# Altium PCB merigold_v1.PcbDoc
Units mm, origin at the board's own origin, x right, y up, seen from the top; angles counter-clockwise.
Board outline 99.57 x 99.57 mm, 2 copper layers (Top Layer, Bottom Layer), stack 0.325 mm thick; 34 components, 22 nets, 139 pads, 5 vias.
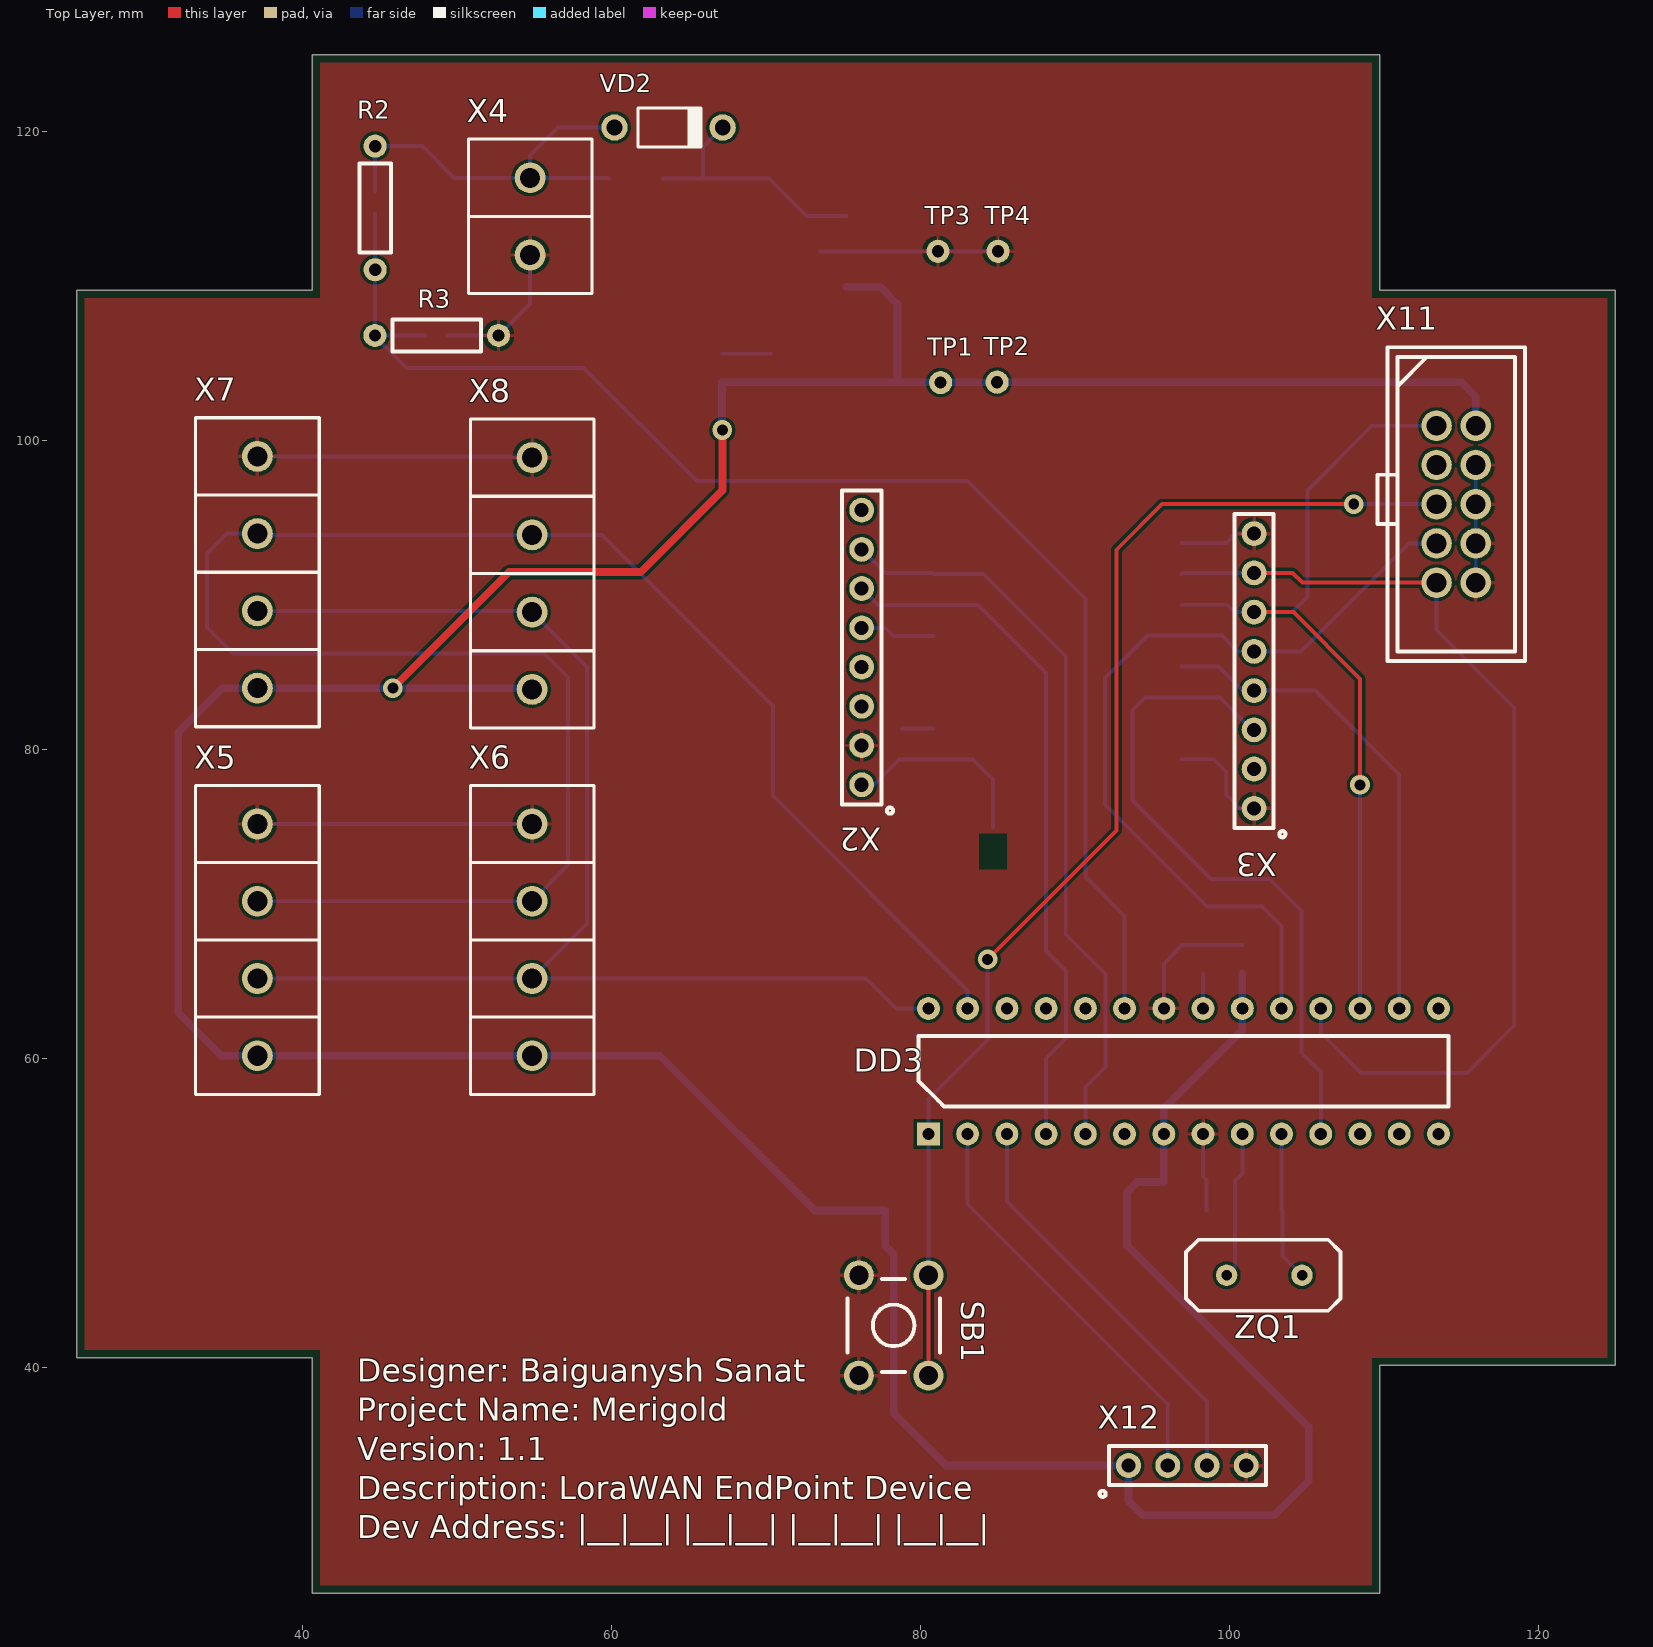
[diagram p0: Top Layer view]
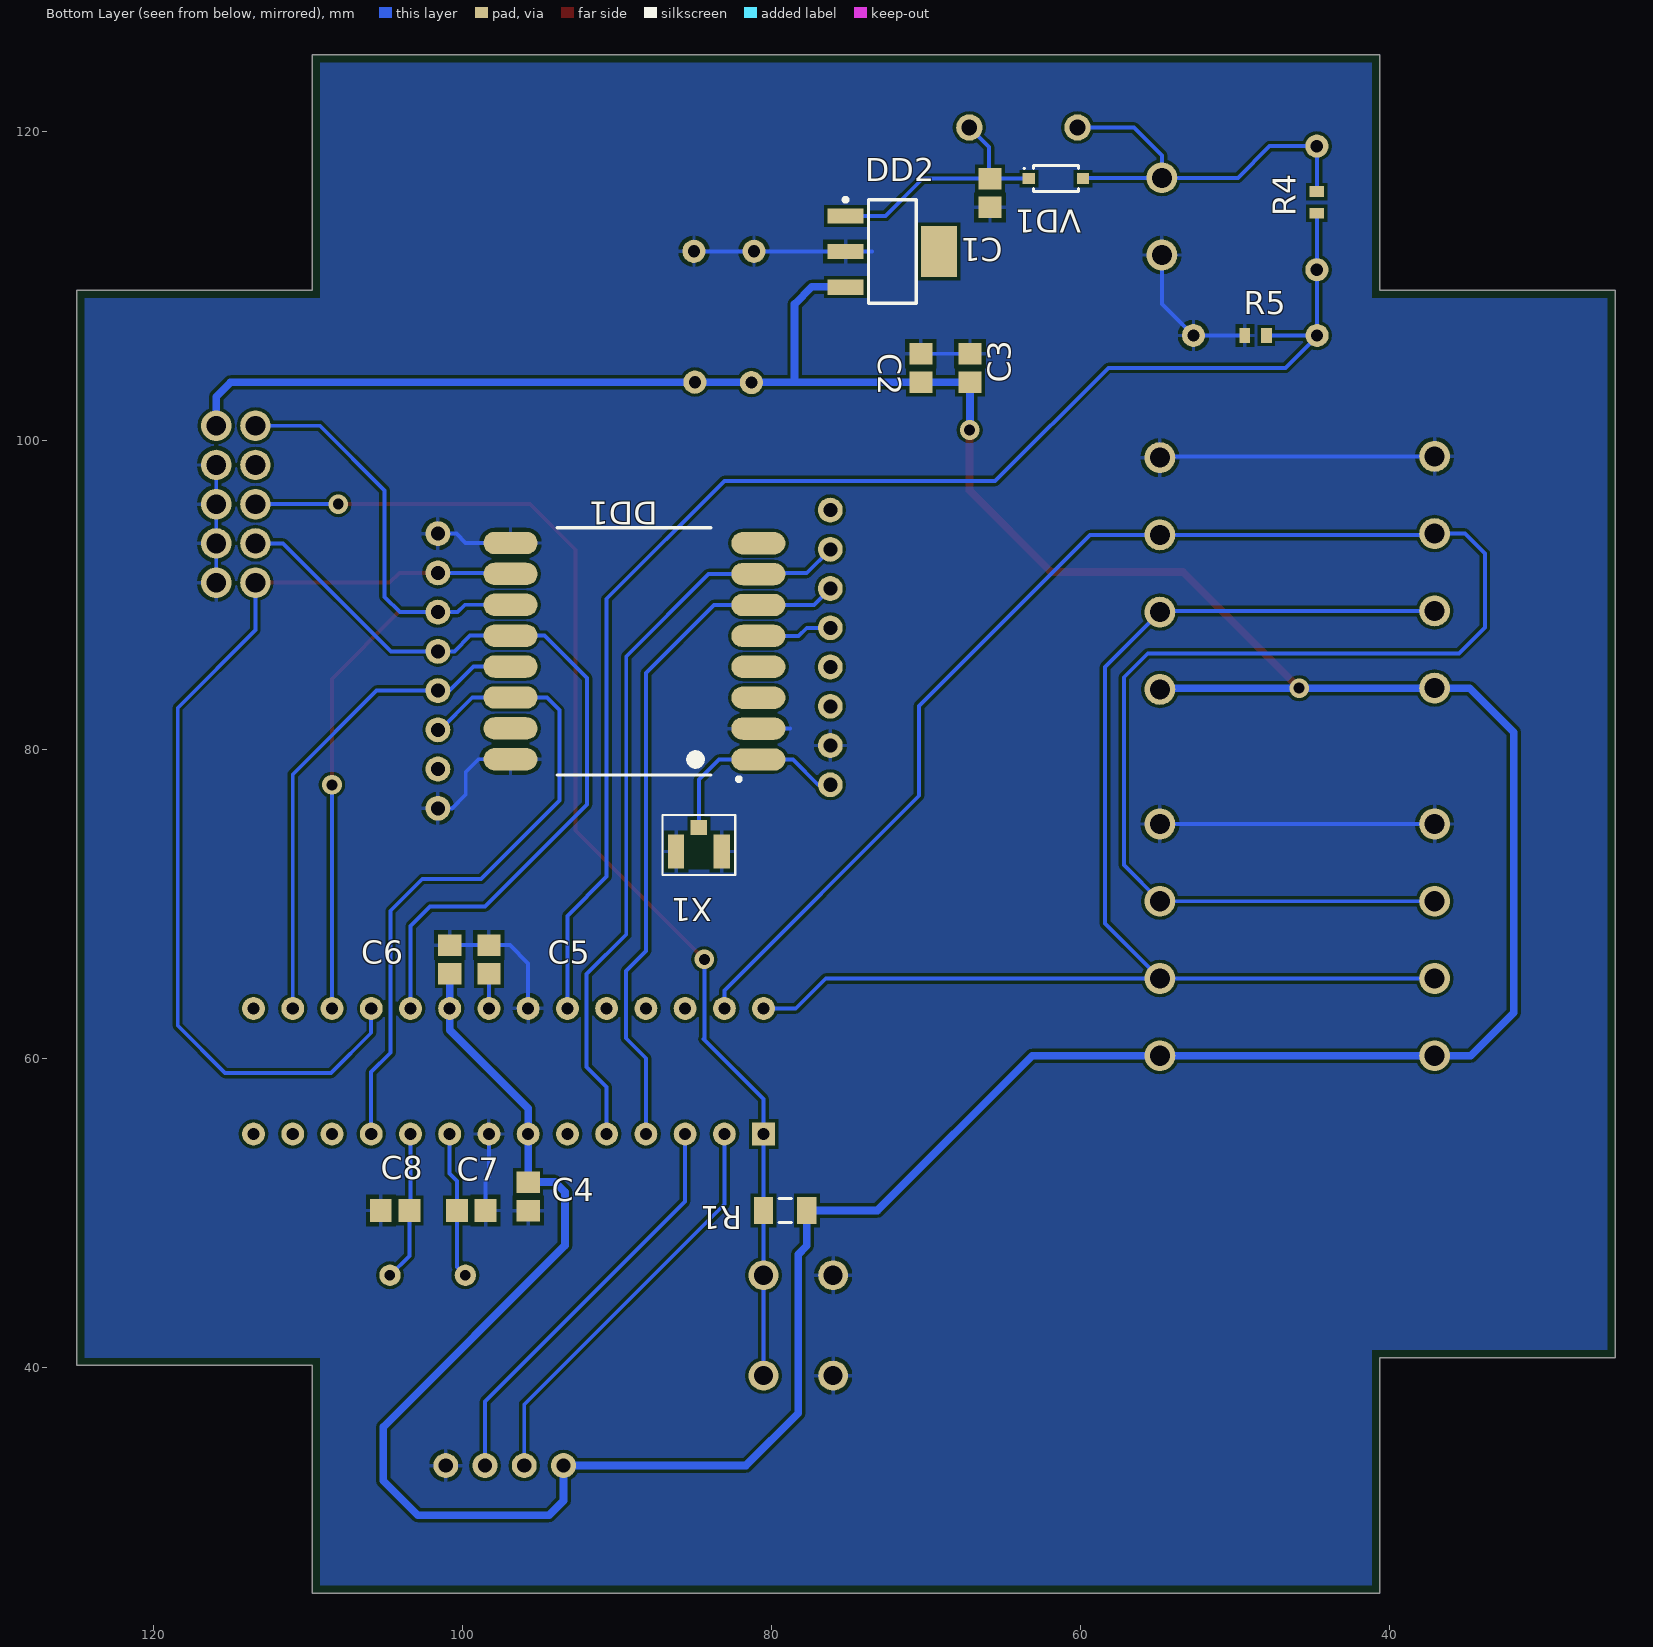
[diagram p1: Bottom Layer view, seen from below]

## Layer stack, top to bottom
Top Solder: solder mask 0.0102, Solder Resist, Dk 3.5
Top Layer: signal copper 0.0356
Dielectric 1: core 0.254, FR-4, Dk 4.2
Bottom Layer: signal copper 0.0356
Bottom Solder: solder mask 0.0102, Solder Resist, Dk 3.5

## Board outline
25.4,40.64 25.4,109.728 40.64,109.728 40.64,124.968 109.728,124.968 109.728,109.728 124.968,109.728 124.968,40.132 109.728,40.132 109.728,25.4 40.64,25.4 40.64,40.64

## Design rules (kind name [scope] priority, off if disabled: settings)
Clearance [All] p1: gap=0.2 ignorepadtopadclearanceinfootprint=FALSE except(0.254: Arc-Arc Arc-Track Track-Track)
PolygonConnect [All] p1: connectstyle=Relief reliefconductorwidth=0.254 reliefentries=4 polygonreliefangle="90 Angle" airgapwidth=0.254
RoomDefinition merigold [InComponentClass('merigold')] p1: confinementstyle=ConfineIn formatcopy=TRUE lockcomponents=FALSE outline 0,0 154.051,0 154.051,142.113 0,142.113
RoutingVias [All] p1: holewidth=0.711 width=1.27 viastyle="Through Hole" minholewidth=0.711 minwidth=1.27 maxholewidth=0.711 maxwidth=1.27
SolderMaskExpansion [All] p1: expansion=0.102
Width Width_+3V3 [InNet('+3V3')] p1: maxlimit=2 minlimit=0.254 preferedwidth=0.254
Width [All] p2: maxlimit=0.254 minlimit=0.254 preferedwidth=0.254
30 further rules are at their usual default settings.

## Components (designator, comment, footprint, x,y, rotation, side; value= is the part's Value field where it differs from the comment)
C1 "10U10V_CAPC" CAPC2012X14M/0805 65.862,116.027 r90 bottom
C2 "10U10V_CAPC" CAPC2012X14M/0805 70.333,104.699 r270 bottom
C3 "1U16V_CAPC" CAPC2012X14M/0805 67.158,104.699 r270 bottom
C4 "1U16V_CAPC" CAPC2012X14M/0805 95.758,51.079 r90 bottom
C5 "1U16V_CAPC" CAPC2012X14M/0805 98.298,66.421 r90 bottom
C6 "1U16V_CAPC" CAPC2012X14M/0805 100.838,66.421 r90 bottom
C7 "22P250V_CAPC" CAPC2012X14M/0805 99.441,50.165 r0 bottom
C8 "22P250V_CAPC" CAPC2012X14M/0805 104.369,50.165 r180 bottom
DD1 "HPD13A (RFM95)" SOJ200P1600X200-16M 88.9,86.36 r0 bottom
DD2 "LM1117MPX-3.3/NOPB" SOT230P700X180-4M 72.187,112.243 r180 bottom
DD3 "ATMEGA328" PDIP28 97.028,59.182 r90 top
R1 "10K1206" RESC3216X07N/1206 79.121,50.165 r180 bottom
R2 "RNF14FTD100K" RESAD800W55L600D230 44.704,115.062 r90 top
R3 "RNF14FTD100K" RESAD800W55L600D230 48.692,106.807 r180 top
R4 "100K0603" RESC1608X06N/0603 44.704,115.418 r90 bottom
R5 "100K0603" RESC1608X06N/0603 48.666,106.807 r180 bottom
SB1 "BTN_TACTILE_6X6" BTN_TACTILE_6X6 76.018,39.474 r90 top
TP1 "TP_TH" TH_TP 81.305,103.759 r0 top
TP2 "TP_TH" TH_TP 84.963,103.784 r0 top
TP3 "TP_TH" TH_TP 81.139,112.254 r0 top
TP4 "TP_TH" TH_TP 85.025,112.254 r0 top
VD1 "MBR120VLSFT1G" SOD-123 61.595,116.967 r180 bottom
VD2 "HER107G R0G" DO-204AL 60.198,120.269 r0 top
X1 "U.FL-R-SMT-1_sch" U.FL-R-SMT-1 84.709,73.406 r0 bottom
X2 "PLS_8" PLS_8 76.2,77.724 r180 top
X3 "PLS_8" PLS_8 101.6,76.2 r180 top
X4 "2EDGV-5.0-02P" 2EDGV-5.0-02P 54.737,117.014 r270 top
X5 "2EDGV-5.0-04P" 2EDGV-5.0-04P 37.084,60.184 r90 top
X6 "2EDGV-5.0-04P" 2EDGV-5.0-04P 54.864,60.184 r90 top
X7 "2EDGV-5.0-04P" 2EDGV-5.0-04P 37.084,83.98 r90 top
X8 "2EDGV-5.0-04P" 2EDGV-5.0-04P 54.864,83.9 r90 top
X11 "ISP" 302_SERIES_10POS 113.411,100.965 r0 top
X12 "61300411121" PLS_4 93.472,33.655 r90 top
ZQ1 "HC49U-8-30-50-70-30-ATF" XTAL1050X465X350 104.702,45.974 r180 top

## Footprints (in the part's own frame and the unit in brackets; to place one, negate y for a bottom-side part, rotate by r counter-clockwise, add the part's x,y. Pads: shape width x height; smd on the part's side, far side on the other; paste and mask are expansions set on the pad)
2EDGV-5.0-02P [mm]
  round 2 hole 1.3: 1(0,0) 2(5,0)
  silkscreen extent -2.5,-4 7.5,4, body extent -2.5,-4 7.5,4, height 12
2EDGV-5.0-04P [mm]
  round 2 hole 1.3: 1(0,0) 2(5,0) 3(10,0) 4(15,0)
  silkscreen extent -2.5,-4 17.5,4, body extent -2.5,-4 17.5,4, height 12
302_SERIES_10POS [mm] "2.54MM DUAL ROW VERTICAL BOX HEADER"
  round 1.97 hole 1.27: 1(0,0) 2(2.54,0) 3(0,-2.54) 4(2.54,-2.54) 5(0,-5.08) 6(2.54,-5.08) 7(0,-7.62) 8(2.54,-7.62) 9(0,-10.16) 10(2.54,-10.16)
  silkscreen extent -3.81,-15.24 5.71,5.08
BTN_TACTILE_6X6 [mm] "SWITCH TACTILE SPST-NO 0.05A 24V"
  round 1.94 hole 1.24: 1(0,0) 2(6.5,0) 3(0,-4.5) 4(6.5,-4.5)
  silkscreen extent 0.25,-5.25 6.25,0.75, body extent 0.25,-5.25 6.25,0.75, height 8
CAPC2012X14M/0805 [mm] "Chip Capacitor, 2-Leads, Body 2,00x1,25mm, IPC Low Density"
  rect 1.4x1.5 smd: 1(-0.925,0) 2(0.925,0)
  body extent -1,-0.63 1,0.63, height 1.35
DO-204AL [mm]
  round 1.71 hole 1.01: A(0,0) K(7,0)
  silkscreen extent 1.52,-1.27 5.59,1.27
PDIP28 [mil] "Plastic Dual  Inline Package 28-lead"
  rect 58.39x58.39 hole 30.83: 1(-160,650)
  round 58.39 hole 30.83: 2(-160,550) 3(-160,450) 4(-160,350) 5(-160,250) 6(-160,150) 7(-160,50) 8(-160,-50) 9(-160,-150) 10(-160,-250) 11(-160,-350) 12(-160,-450) 13(-160,-550) 14(-160,-650) 15(160,-650) 16(160,-550) 17(160,-450) 18(160,-350) 19(160,-250) 20(160,-150) 21(160,-50) 22(160,50) 23(160,150) 24(160,250) 25(160,350) 26(160,450) 27(160,550) 28(160,650)
  silkscreen extent -90,-675 90,675, body extent -150,-675 150,675, height 180
PLS_4 [mm]
  round 1.61 hole 0.91: 1(0,0) 2(0,-2.54) 3(0,-5.08) 4(0,-7.62)
  silkscreen extent -2.03,-8.89 1.27,1.88
PLS_8 [mm]
  round 1.61 hole 0.91: 1(0,0) 2(0,-2.54) 3(0,-5.08) 4(0,-7.62) 5(0,-10.16) 6(0,-12.7) 7(0,-15.24) 8(0,-17.78)
  silkscreen extent -2.03,-19.05 1.27,1.88
RESAD800W55L600D230 [mm]
  round 1.5 hole 0.8: 1(-4,0) 2(4,0)
  silkscreen extent -2.88,-1.02 2.88,1.02, body extent -3,-1.15 3,1.15, height 3.29
RESC1608X06N/0603 [mm] "Chip Resistor, 2-Leads, Body 1,60x0,82mm, IPC Medium Density"
  rect 0.7x0.95 smd: 1(-0.7,0) 2(0.7,0)
  body extent -0.85,-0.48 0.85,0.48, height 0.6
RESC3216X07N/1206 [mm] "Chip Resistor, 2-Leads, Body 3,20x1,60mm, IPC Medium Density"
  rect 1.25x1.75 smd: 1(-1.4,0) 2(1.4,0)
  silkscreen extent -0.4,-0.77 0.4,0.77, body extent -1.68,-0.87 1.68,0.87, height 0.71
SOD-123 [mm] "SODFL, 2-Leads, Body 1,55x3,70mm, IPC Medium Density"
  rect 0.8x0.7 smd: A(1.75,0) K(-1.75,0)
  silkscreen extent -2.1,-0.85 1.45,0.85, body extent -1.42,-0.85 1.43,0.85, height 1.35
SOJ200P1600X200-16M [mm] "SOJ, 16-Leads, Body 16,00x16,00mm, Pitch 2,00mm, IPC Low Density"
  oval 3.5x1.45 smd: 1(-8.045,7) 2(-8.045,5) 3(-8.045,3) 4(-8.045,1) 5(-8.045,-1) 6(-8.045,-3) 7(-8.045,-5) 8(-8.045,-7) 9(8.001,-7.015) 10(8.001,-5.015) 11(8.001,-3.015) 12(8.001,-1.015) 13(8.001,0.985) 14(8.001,2.985) 15(8.001,4.985) 16(8.001,6.985)
  silkscreen extent -6.9,-8 4.97,8.4, body extent -8,-8 8,8, height 2
SOT230P700X180-4M [mm] "SOT223, 4-Leads, Body 6,50x7,00mm (avg), Pitch 2,30mm, IPC Low Density"
  rect 2.35x1 smd: 1(-3.025,2.3) 2(-3.025,0) 3(-3.025,-2.3)
  rect 2.35x3.3 smd: 4(3.025,0)
  silkscreen extent -3.15,-3.35 1.55,3.47, body extent -1.85,-3.35 1.85,3.35, height 1.8
TH_TP [mm]
  round 1.5 hole 0.8: 1(0,0)
U.FL-R-SMT-1 [mm]
  rect 1.05x1 smd mask+0.051: 1(0,-1.55)
  rect 1.05x2.2 smd mask+0.051: 2(1.475,0) 3(-1.475,0)
  Top Layer pour cut-out: -0.914,1.143 0.889,1.143 0.889,-1.118 0.914,-1.143 -0.914,-1.143
  Bottom Layer pour cut-out: -0.914,1.143 0.889,1.143 0.889,-1.118 0.914,-1.143 -0.914,-1.143
  silkscreen extent -2.35,-2.36 2.35,1.53, body extent -1.5,-1.55 1.5,1.55, height 1.25
XTAL1050X465X350 [mm]
  round 1.38 hole 0.68: 1(0,0) 2(4.88,0)
  silkscreen extent -2.5,-2.3 7.5,2.3, body extent -2.5,-2.3 7.5,2.3, height 3.5

## Part data
C1 C2: "CAP CER 10UF 10V X5R 0805", Capacitance="10 µF", Manufacturer="Samsung Electro-Mechanics", Manufacturer Part Number=CL21A106KPFNNNG
C3 C4 C5 C6: "CAP CER 1UF 16V X7R 0805", Capacitance="1 µF", Manufacturer="Murata Manufacturing", Manufacturer Part Number=GRM21BR71C105KA01K
C7 C8: "CAP CER 22PF 250V C0G/NP0 0805", Capacitance="22 pF", Manufacturer="Murata Manufacturing", Manufacturer Part Number=GRM21A5C2E220JW01
DD1: "RF TXRX MODULE ISM<1GHZ", Manufacturer="RF Solutions", Manufacturer Part Number=RFM95W-868S2, Category="RF/IF and RFID"
DD2: library part AMS1117, "IC REG LIN 3.3V 800MA SOT223-4", Manufacturer="Texas Instruments", Manufacturer Part Number=LM1117MPX-3.3/NOPB
DD3: library part ATMEGA328P-PU, "IC MCU 8BIT 32KB FLASH 28DIP", Manufacturer="Microchip / Atmel", Manufacturer Part Number=ATMEGA328P-PU
R1: "RES SMD 10K OHM 1% 1/4W 1206", Manufacturer=Panasonic, Manufacturer Part Number=ERJ8ENF1002V, Rated Power="0.25 W", Resistance="10 kO", Tolerance (%)="±1 %"
R2 R3: library part 100K_AD800W55L600D230, "RES 100K OHM 1/4W 5% AXIAL", Manufacturer="Stackpole Electronics", Power (Watts)="0.25W, 1/4W", Resistance (Ohms)=100k, Category=Resistors, Manufacturer Part Number=RNF14FTD100K
R4 R5: "RES SMD 100K OHM 1% 1/4W 0603", Manufacturer=ESR03EZPF1003, Manufacturer Part Number=ESR03EZPF1003
SB1: "SWITCH TACTILE SPST-NO 0.05A 24V", Manufacturer="TE Connectivity Alcoswitch", Manufacturer Part Number=1825910-6, Pole Throw Configuration=SPST
TP1 TP2 TP3 TP4: "TEST POINT THROUGH HOLE"
VD1: "DIODE SCHOTTKY 20V 1A SOD123FL", Manufacturer="ON Semiconductor", Manufacturer Part Number=MBR120VLSFT1G
VD2: "DIODE GEN PURP 800V 1A DO204AL", Manufacturer="Taiwan Semiconductor Corporation", Manufacturer Part Number="HER107G R0G"
X1: "CONN U.FL RCPT STR 50 OHM SMD", Manufacturer=Hirose, Manufacturer Part Number=U.FL-R-SMT-1(10), Category="Connectors, Interconnects"
X2 X3: "CONN HEADER VERT 8POS 2.54MM", Manufacturer=Harwin, Manufacturer Part Number=M20-7820842, Category="Connector Headers and PCB Receptacles", Number of Contacts=8, Number of Rows=1, Pitch="2.54 mm"
X4: "TERM BLOCK HDR 2POS VERT 5MM", Manufacturer="Phoenix Contact", Manufacturer Part Number=1753437
X5 X6 X7 X8: "TERM BLOCK HDR 4POS VERT 5MM", Manufacturer="Phoenix Contact", Manufacturer Part Number=1753479
X11: "CONN HEADER VERT 10POS 2.54MM", Manufacturer="On-Shore Technology", Manufacturer Part Number=302-S101, Category="Connectors, Interconnects", ManufacturerPartNumber=302-S101, Number of Positions=10, Number of Rows=2, Pitch="0.100\" (2.54mm)"
X12: library part PLS_4, "CONN HEADER VERT 4POS 2.54MM", Manufacturer="Wurth Electronics", Category="Connectors, Interconnects", Manufacturer Part Number=61300411121, Number of Contacts=3, Number of Positions=3, Number of Rows=1, Pitch="0.100\" (2.54mm)"
ZQ1: "CRYSTAL 8.0MHZ 30PF SMD", Frequency="8 MHz", Load Capacitance="30 pF", Manufacturer="IQD Frequency Products", Category=Crystals, Manufacturer Part Number=HC49U-8-30-50-70-30-ATF

## Via types
v1: diameter 1.27, hole 0.711, Top Layer to Bottom Layer, 5 vias

## Nets (pads, with @x,y where several pads share a name; then routed paths per layer and width w, separated by ;. In a path a pad name is that pad's centre, name@x,y a point inside that pad or via, vN(x,y) a via of type N, cw(c..) or ccw(c..) an arc to the next point about the centre after c; other vN are vias at no path point)
+3V3: C2.2 C3.2 C4.2 C6.1 DD2.3 DD3.7 DD3.20 R1.2 TP1.1 TP2.1 X5.1 X6.1 X7.1 X8.1 X11.2 X12.1 | length 274
  Top Layer w0.5: v1(45.847,83.972) 53.365,91.491 61.9,91.491 67.183,96.774 v1(67.183,100.686)
  Bottom Layer w0.5: X8.1 54.864,83.98 X7.1 34.806,83.98 31.953,81.128 31.953,62.967 34.736,60.184 X5.1 X6.1 63.133,60.184 73.152,50.165 R1.2 77.721,47.882 78.283,47.32 78.283,37.033 81.661,33.655 X12.1 93.472,31.369 94.412,30.429 102.895,30.429 105.131,32.664 105.131,36.144 93.37,47.904 93.37,51.359 94.016,52.004 C4.2 DD3.7 95.758,56.769 100.838,61.849 DD3.20 C6.1 ; v1(67.183,100.686) 67.158,100.711 C3.2 C2.2 78.511,103.774 ; DD2.3@75.212,109.954 77.396,109.954 78.511,108.839 78.511,103.774 ; X11.2 115.951,102.845 115.022,103.774 84.963,103.774 78.511,103.774
A0: DD3.23 R2.1 R3.2 R4.1 R5.2 | length 92
  Top Layer w0.254: R3.2@44.641,106.807 R3.2@44.704,106.87
  Bottom Layer w0.254: R3.2 R5.2 ; R4.1 R2.1 44.704,106.87 44.641,106.807 46.737,104.712 58.204,104.712 65.532,97.384 83.058,97.384 90.678,89.764 90.678,71.78 93.218,69.24 DD3.23
ANT: DD1.1 X1.1 X2.1 | length 12.8
  Bottom Layer w0.254: X2.1 76.987,77.724 78.623,79.36 DD1.1 83.403,79.36 84.709,78.054 X1.1
D2: DD1.6 DD3.4 X2.6 | length 45.1
  Bottom Layer w0.254: X2.6 77.264,89.36 DD1.6 83.741,89.36 88.138,84.963 88.138,66.962 89.433,65.666 89.433,61.316 88.138,60.02 DD3.4
D3: DD1.7 DD3.5 X2.7 | length 48.6
  Bottom Layer w0.254: X2.7 77.724,91.44 80.775,91.44 DD1.7 84.078,91.36 89.408,86.03 89.408,68.028 91.973,65.462 91.973,59.461 90.678,58.166 DD3.5
D5: DD1.14 DD3.11 X3.3 | length 43.8
  Bottom Layer w0.254: X3.3 101.473,81.28 99.378,83.375 DD1.14 94.551,83.375 93.726,82.55 93.726,76.708 98.806,71.628 102.616,71.628 104.673,69.571 104.673,60.376 105.927,59.122 105.927,55.127 DD3.11
D10: DD1.13 DD3.16 X3.4 | length 32.1
  Bottom Layer w0.254: DD1.13 99.308,85.375 100.863,83.82 X3.4 105.562,83.82 110.998,78.384 DD3.16
D11: DD1.11 DD3.17 X3.6 X11.1 | length 55.7
  Top Layer w0.254: X3.6 104.14,88.9 108.458,84.582 v1(108.458,77.724)
  Bottom Layer w0.254: DD1.11 99.855,89.375 100.33,88.9 X3.6 104.064,88.9 105.054,89.891 105.054,96.774 109.245,100.965 X11.1 ; DD3.17 v1(108.458,77.724)
D12: DD1.10 DD3.18 X3.7 X11.9 | length 64
  Top Layer w0.254: X3.7 104.089,91.44 104.724,90.805 X11.9
  Bottom Layer w0.254: DD1.10 96.966,91.44 X3.7 ; DD3.18 105.918,61.671 108.516,59.073 115.384,59.073 118.44,62.129 118.44,82.702 113.411,87.732 X11.9
D13: DD1.12 DD3.19 X3.5 X11.7 | length 54.1
  Bottom Layer w0.254: DD3.19 103.378,68.58 102.108,69.85 98.552,69.85 91.948,76.454 91.948,84.633 94.69,87.375 DD1.12 99.518,87.375 100.533,86.36 X3.5 104.648,86.36 111.633,93.345 X11.7
GND: C1.1 C2.1 C3.1 C4.1 C5.2 C6.2 C7.1 C8.1 DD1.2 DD1.9 DD1.16 DD2.2 DD3.8 DD3.22 R3.1 R5.1 SB1.1 SB1.2 TP3.1 TP4.1 X1.2 X1.3 X2.2 X3.1 X3.8 X4.2 X5.4 X6.4 X7.4 X8.4 X11.4 X11.6 X11.8 X11.10 X12.4 | length 94.9
  Top Layer w0.254: X7.4 X7.4@37.164,98.9 ; X4.2@54.675,112.076 X4.2
  Bottom Layer w0.254: X5.4 X6.4 ; X7.4 54.784,98.98 X8.4 ; R5.1 R3.1 54.737,108.852 X4.2 ; C3.1 C2.1 ; 73.487,112.254 TP3.1 TP4.1 ; 78.82,81.36 DD1.2 ; DD3.22 95.758,66.167 96.937,67.346 C5.2 C6.2 ; DD1.16 98.984,79.375 99.797,78.562 99.797,77.089 100.686,76.2 X3.1 ; DD1.9 99.801,93.375 100.406,93.98 X3.8 ; DD3.8 98.298,52.349 98.516,52.131 C7.1 ; X11.10 X11.8 X11.6 X11.4
NetC1_2: C1.2 DD2.1 VD1.K VD2.K | length 16.7
  Bottom Layer w0.254: VD1.K C1.2@65.928,116.967 ; VD2.K 65.928,118.999 C1.2@65.928,116.967 ; DD2.1@75.212,114.554 72.619,114.554 70.216,116.956 65.938,116.956 C1.2@65.928,116.967
NetC5_1: C5.1 DD3.21 | length 2.3
  Bottom Layer w0.254: DD3.21 C5.1
NetC7_2: C7.2 DD3.9 ZQ1.2 | length 9.6
  Bottom Layer w0.254: ZQ1.2 100.366,46.518 C7.2 100.366,52.081 100.838,52.553 DD3.9
NetC8_2: C8.2 DD3.10 ZQ1.1 | length 9.7
  Bottom Layer w0.254: DD3.10 103.378,50.231 C8.2 103.444,47.232 ZQ1.1
NetDD1_5: DD1.5 X2.5 | length 4.9
  Bottom Layer w0.254: X2.5 77.724,87.884 78.248,87.36 DD1.5
NetR2_2: R2.2 R4.2 VD1.A VD2.A X4.1 | length 26.6
  Top Layer w0.254: X4.1@54.719,117.032 X4.1
  Bottom Layer w0.254: R4.2 R2.2 47.765,119.062 49.813,117.014 X4.1 ; VD1.A 59.798,117.014 X4.1 ; VD2.A 56.54,120.269 54.737,118.466 X4.1
RST: DD3.1 R1.1 SB1.3 SB1.4 X11.5 | length 87
  Top Layer w0.254: SB1.3 SB1.4 ; v1(84.353,66.421) 92.685,74.752 92.685,92.939 95.631,95.885 v1(108.052,95.885)
  Bottom Layer w0.254: SB1.3 SB1.4 80.521,45.977 R1.1 80.518,50.168 DD3.1 80.518,57.379 84.404,61.265 84.353,61.316 v1(84.353,66.421) ; v1(108.052,95.885) X11.5
RXD: DD3.2 X12.2 | length 26.8
  Bottom Layer w0.254: DD3.2 83.058,50.571 96.012,37.617 X12.2
SCL: DD3.28 X5.2 X6.2 X7.2 X8.2 | length 88.8
  Top Layer w0.254: X8.2@54.784,88.98 X8.2
  Bottom Layer w0.254: X5.2 X6.2 ; X7.2 54.784,88.98 X8.2 58.42,85.344 58.42,68.74 X6.2 ; DD3.28 78.435,63.246 76.497,65.184 X6.2
SDA: DD3.27 X5.3 X6.3 X7.3 X8.3 | length 129.4
  Top Layer w0.254: X8.3@54.784,93.98 X8.3
  Bottom Layer w0.254: X5.3 X6.3 57.201,72.521 57.201,84.684 55.651,86.233 35.509,86.233 33.833,87.909 33.833,92.685 35.128,93.98 X7.3 37.164,93.9 X8.3 59.389,93.9 70.46,82.829 70.46,77.013 83.058,64.414 DD3.27
TXD: DD3.3 X12.3 | length 26.8
  Bottom Layer w0.254: DD3.3 85.598,50.749 98.552,37.795 X12.3
pads on no net: DD1.3 DD1.4 DD1.8 DD1.15 DD2.4 DD3.6 DD3.12 DD3.13 DD3.14 DD3.15 DD3.24 DD3.25 DD3.26 X2.3 X2.4 X2.8 X3.2 X11.3

## Polygon pours and split planes (outlines as drawn)
GND on Bottom Layer "Top Overlay-No Net" (solid, pour order 8): 41.148,25.908 41.148,41.148 25.908,41.148 25.908,109.22 41.148,109.22 41.148,124.46 109.22,124.46 109.22,109.22 124.46,109.22 124.46,40.64 109.22,40.64 109.22,25.908
GND on Top Layer "Top Overlay-No Net" (solid, pour order 10): 41.148,25.908 41.148,41.148 25.908,41.148 25.908,109.22 41.148,109.22 41.148,124.46 109.22,124.46 109.22,109.22 124.46,109.22 124.46,40.64 109.22,40.64 109.22,25.908

## Silkscreen, mask and mechanical layers (free items; w line width, h text height)
Top Overlay:
  text "Designer: Baiguanysh Sanat / Project Name: Merigold / Version: 1.1 / Description: LoraWAN EndPoint Device / Dev Address: |__|__| |__|__| |__|__| |__|__|" at 43.561,28.448 h2.54
Board:
  the board outline again, w0.5

## Dimensions
25.4,109.728 to 124.968,109.728 on Mechanical 13
40.64,124.968 to 40.64,25.4 on Mechanical 13